# Altium PCB PCB1.PcbDoc (part 1 of 2)
Units mm, origin at the board's own origin, x right, y up, seen from the top; angles counter-clockwise.
Board outline 17.5 x 24.5 mm, 4 copper layers (Top Layer, Signal Layer 1, Signal Layer 2, Bottom Layer), stack 0.778 mm thick; 72 components, 48 nets, 266 pads, 79 vias.
Unrouted connection lines stored in the file: 1.
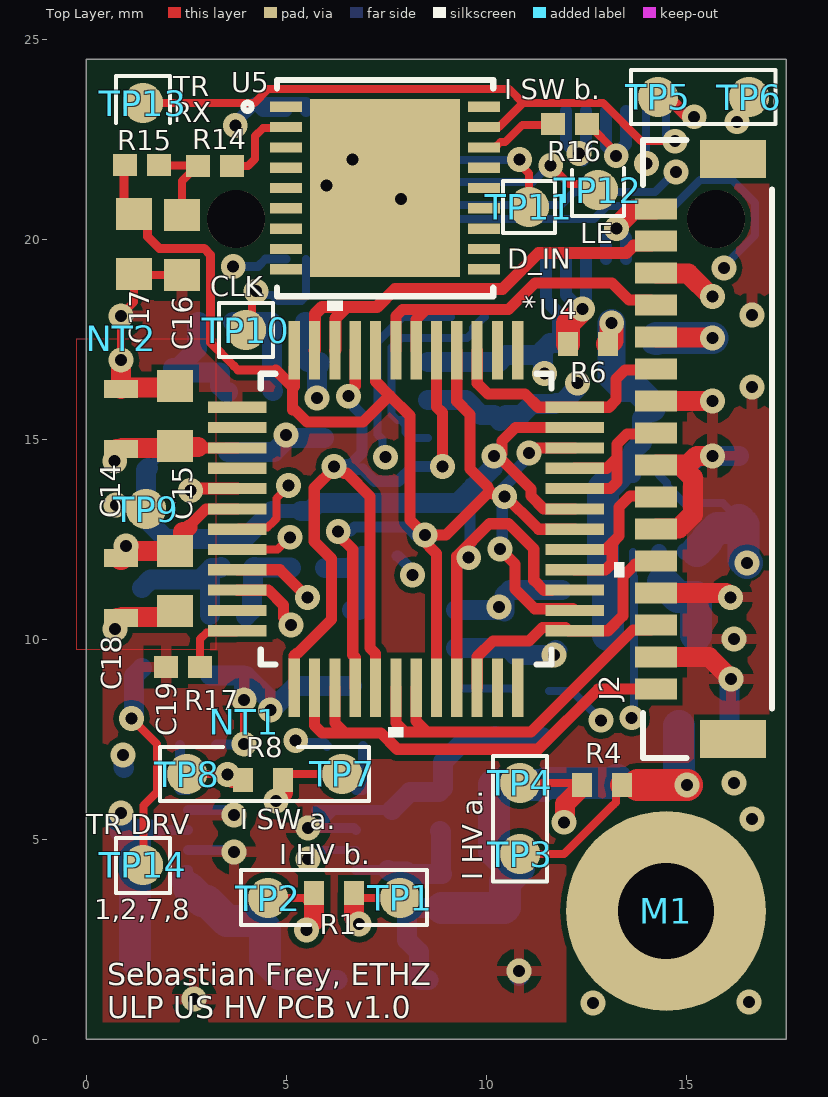
[diagram p0: Top Layer view]
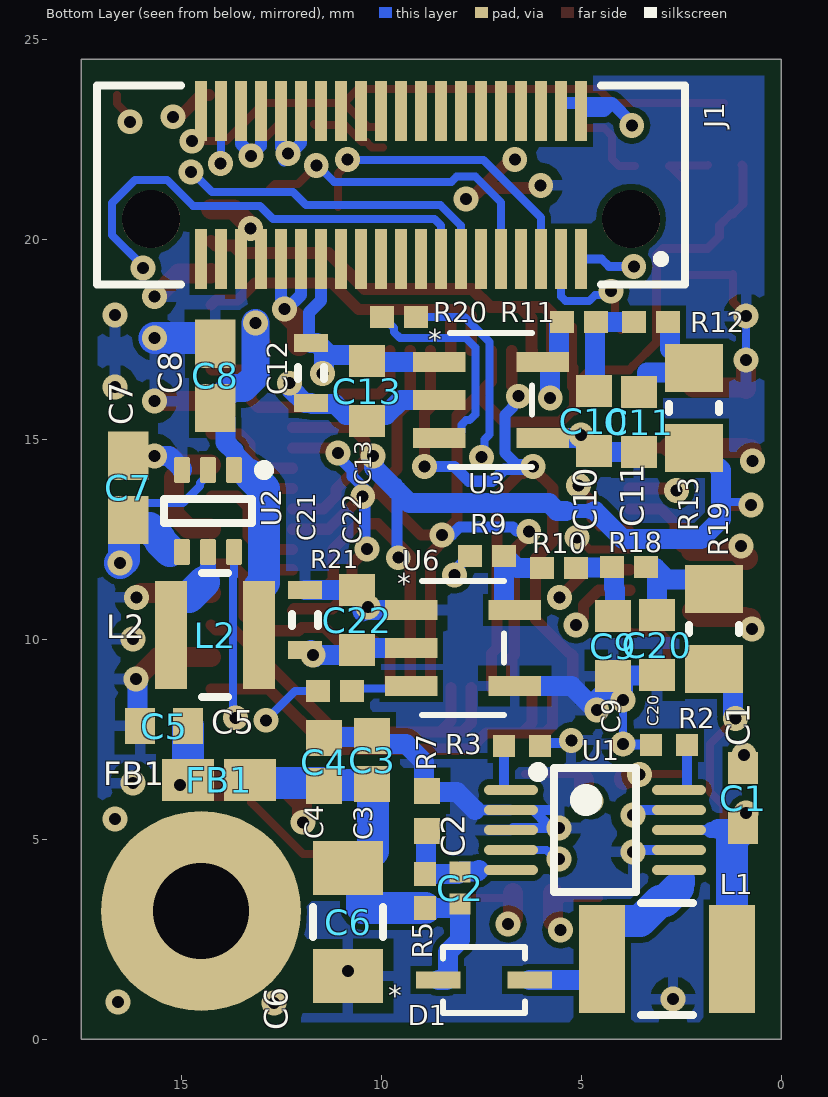
[diagram p1: Bottom Layer view, seen from below]
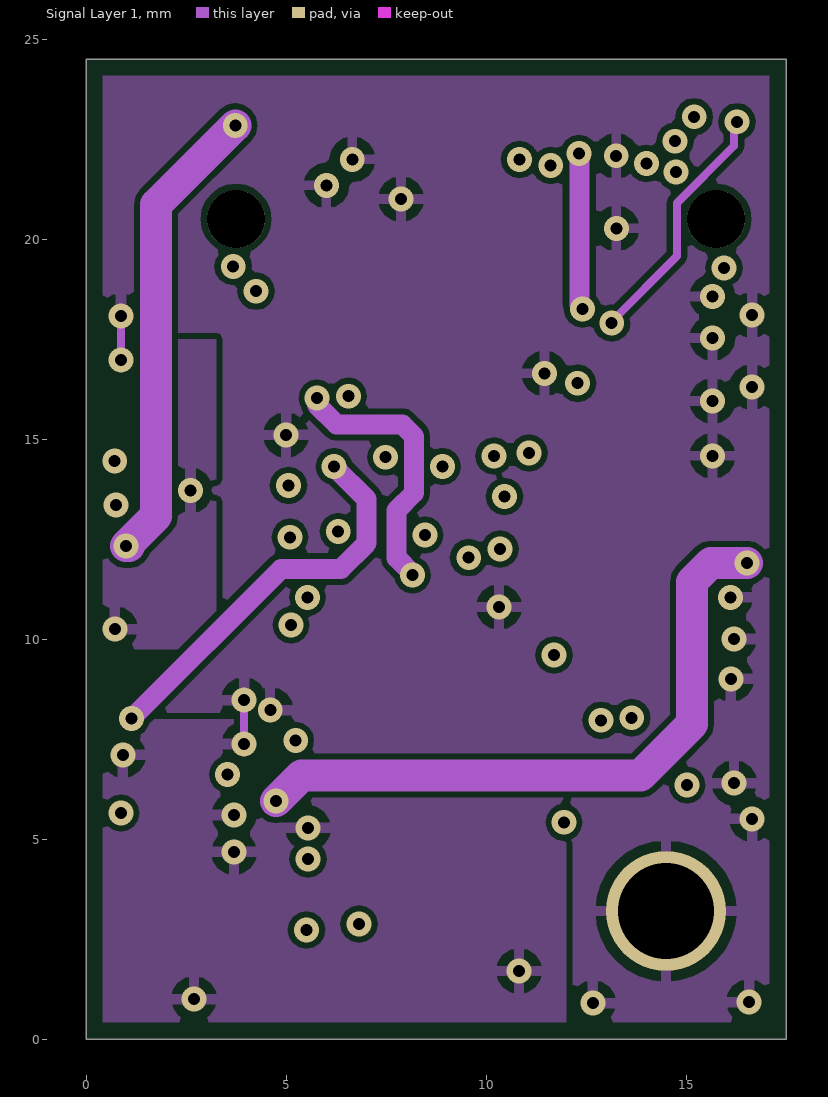
[diagram p2: Signal Layer 1]
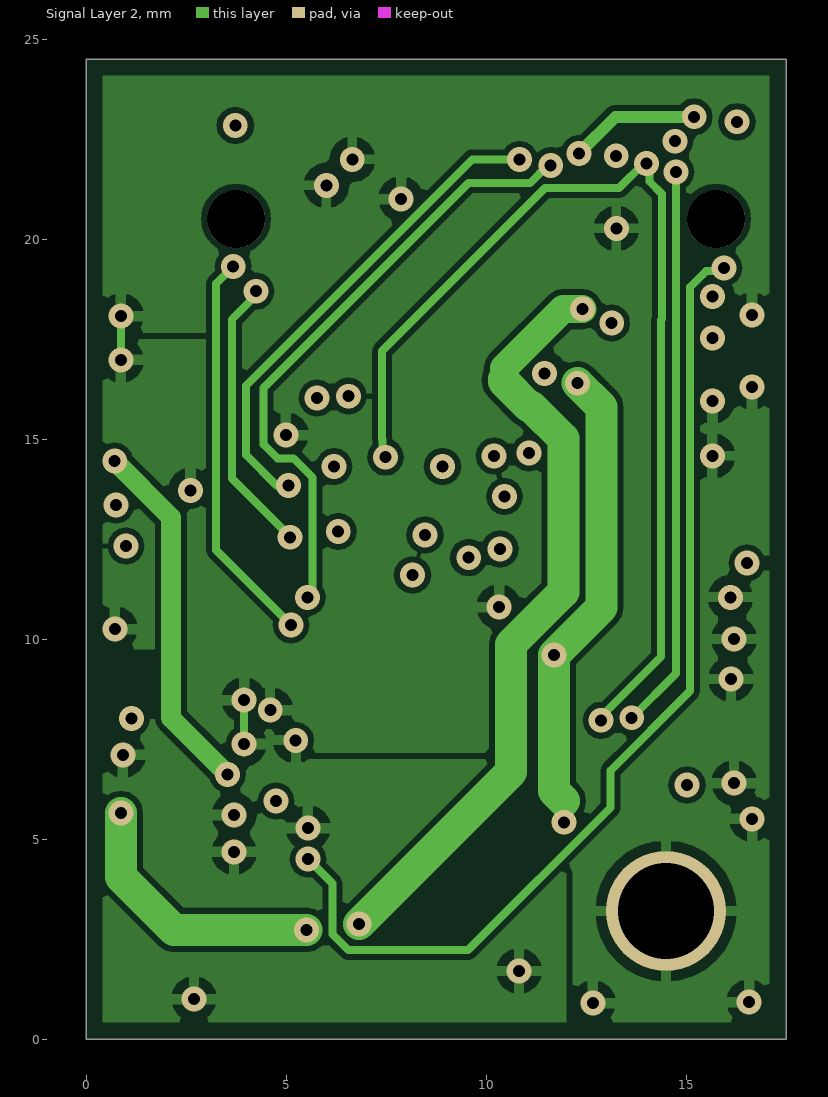
[diagram p3: Signal Layer 2]
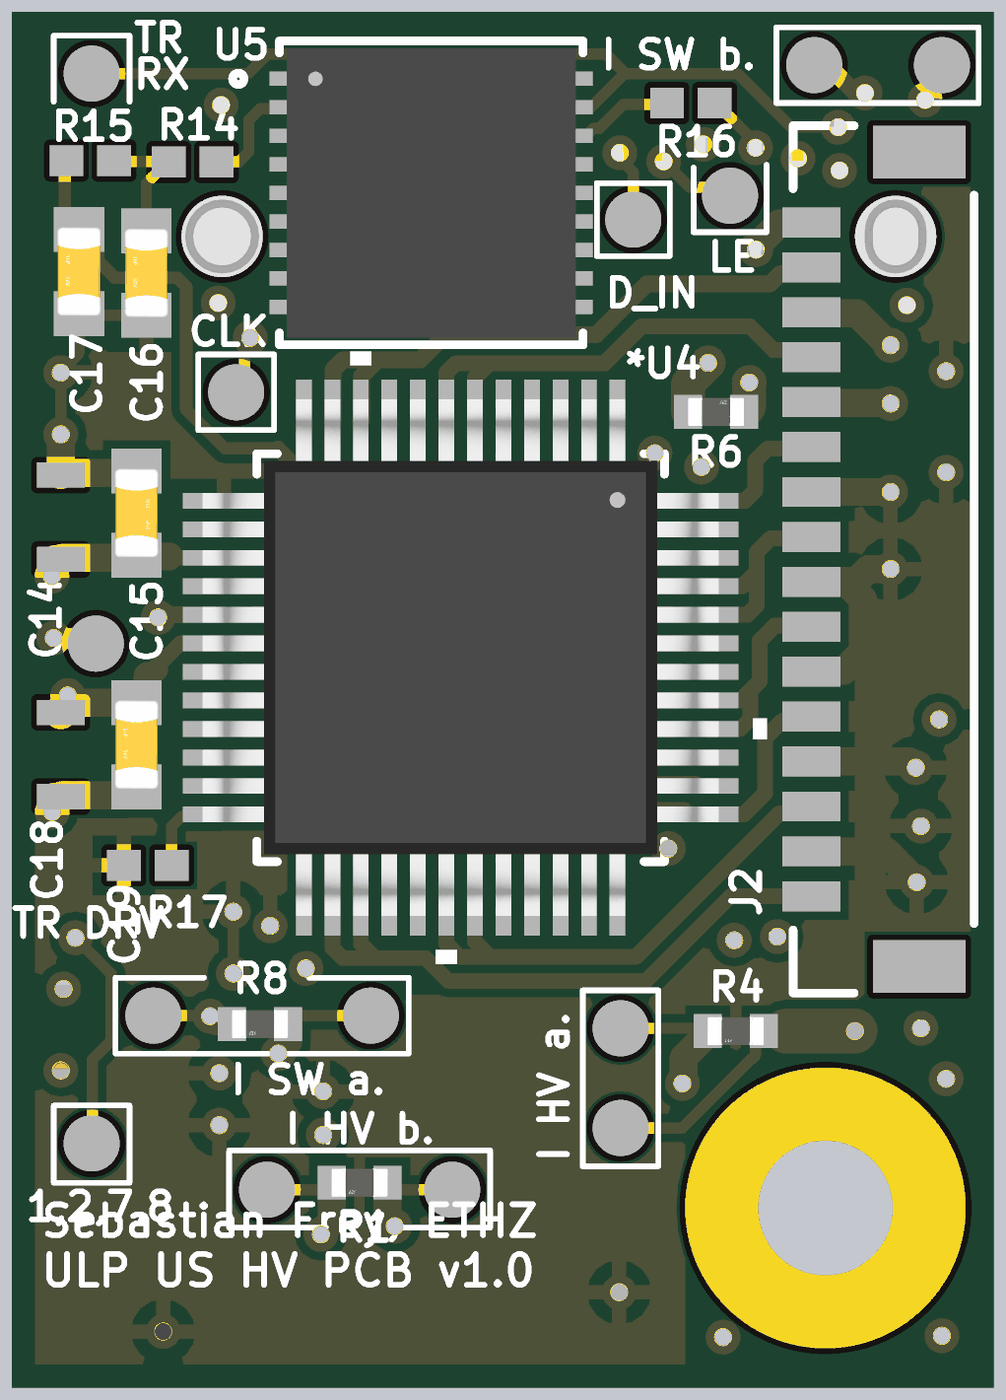
[diagram p4: 3D render of the assembled board from above, using the file's embedded part models]
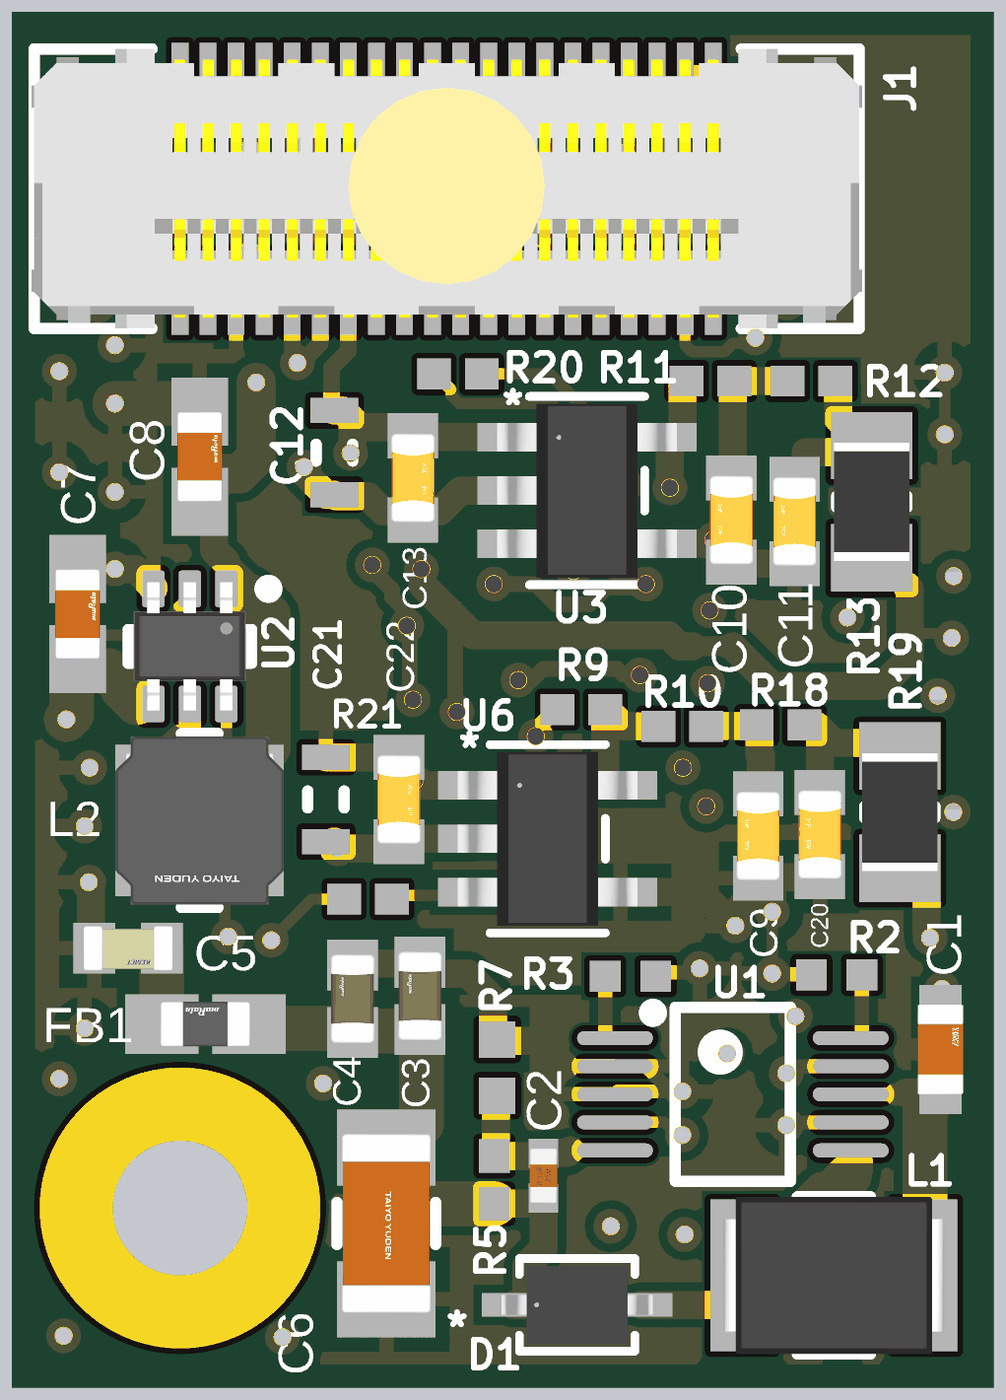
[diagram p5: 3D render of the assembled board from below, using the file's embedded part models]

## Layer stack, top to bottom
Top Solder: solder mask 0.0102, Solder Resist, Dk 3.5
Top Layer: signal copper 0.0356
Dielectric 1: core 0.254, FR-4, Dk 4.2
Signal Layer 1: signal copper 0.036
Dielectric 3: prepreg 0.127, Dk 4.2
Signal Layer 2: signal copper 0.036
Dielectric 2: core 0.254, Dk 4.2
Bottom Layer: signal copper 0.0356
Bottom Solder: solder mask 0.0102, Solder Resist, Dk 3.5

## Board outline
0,0 17.5,0 17.5,24.5 0,24.5

## Design rules (kind name [scope] priority, off if disabled: settings)
BoardOutlineClearance [Not OnSilkscreen] p1: gap=0.406 ignorepadtopadclearanceinfootprint=FALSE
Clearance [All] p1: gap=0.15 ignorepadtopadclearanceinfootprint=FALSE except(0: Arc-Hole Track-Hole SMDPad-Hole THPad-Hole Via-Hole Fill-Hole Poly-Hole Region-Hole Text-Hole)
HoleSize [All] p1: absolutevalues=TRUE maxlimit=2.54 minlimit=0.2 maxpercent=80.000 minpercent=20.000
PolygonConnect PolygonConnect_9 [All vs IsNamedPolygon('VSYS_3V3_IN_L01_P022')] p1: connectstyle=Direct reliefconductorwidth=0.254 reliefentries=4 polygonreliefangle="90 Angle" airgapwidth=0.254
PolygonConnect PolygonConnect_8 [All vs IsNamedPolygon('USS_GND_L01_P021')] p2: connectstyle=Direct reliefconductorwidth=0.254 reliefentries=4 polygonreliefangle="90 Angle" airgapwidth=0.254
PolygonConnect PolygonConnect_7 [All vs IsNamedPolygon('NETL1_1_L01_P020')] p3: connectstyle=Direct reliefconductorwidth=0.254 reliefentries=4 polygonreliefangle="90 Angle" airgapwidth=0.254
PolygonConnect PolygonConnect_6 [All vs IsNamedPolygon('NETC1_1_L01_P019')] p4: connectstyle=Direct reliefconductorwidth=0.254 reliefentries=4 polygonreliefangle="90 Angle" airgapwidth=0.254
PolygonConnect PolygonConnect_5 [All vs IsNamedPolygon('NETL2_1_L01_P016')] p5: connectstyle=Direct reliefconductorwidth=0.254 reliefentries=4 polygonreliefangle="90 Angle" airgapwidth=0.254
PolygonConnect PolygonConnect_4 [All vs IsNamedPolygon('VSYS_MCU_IN_L01_P018')] p6: connectstyle=Direct reliefconductorwidth=0.254 reliefentries=4 polygonreliefangle="90 Angle" airgapwidth=0.254
PolygonConnect PolygonConnect_3 [All vs IsNamedPolygon('NETL2_1_L01_P016')] p7: thpad.connectstyle=Direct thpad.reliefconductorwidth=0.254 thpad.reliefentries=4 thpad.polygonreliefangle="90 Angle" thpad.airgapwidth=0.254 smdpad.connectstyle=Relief smdpad.reliefconductorwidth=0.254 smdpad.reliefentries=4 smdpad.polygonreliefangle="90 Angle" smdpad.airgapwidth=0.254 via.connectstyle=Relief via.reliefconductorwidth=0.254 via.reliefentries=4 via.polygonreliefangle="90 Angle" via.airgapwidth=0.254
PolygonConnect PolygonConnect_2 [All vs IsNamedPolygon('NETC4_1_L01_P015')] p8: connectstyle=Direct reliefconductorwidth=0.254 reliefentries=4 polygonreliefangle="90 Angle" airgapwidth=0.254
PolygonConnect PolygonConnect_1 [All vs IsNamedPolygon('GND_L01_P001')] p9: connectstyle=Direct reliefconductorwidth=0.254 reliefentries=4 polygonreliefangle="90 Angle" airgapwidth=0.254
PolygonConnect [All] p10: connectstyle=Relief reliefconductorwidth=0.254 reliefentries=4 polygonreliefangle="90 Angle" airgapwidth=0.254
RoutingVias [All] p1: holewidth=0.3 width=0.62 viastyle="Through Hole" minholewidth=0.3 minwidth=0.62 maxholewidth=0.3 maxwidth=0.62
SilkToSilkClearance [All] p1: silktosilkclearance=0.01
SilkToSolderMaskClearance [IsPad] p1: minsilkscreentomaskgap=0.01 clearancetoexposedcopper=TRUE
SolderMaskExpansion [All] p1: expansion=0.102 istentingtop=FALSE
Width [All] p1: maxlimit=25 minlimit=0.2 preferedwidth=0.2 toplayer_maxwidth=2.5 midlayer1_maxwidth=2.5 midlayer2_maxwidth=2.5 minimp=50.000000 maximp=50.000000 favimp=50.000000
27 further rules are at their usual default settings.

## Classes and differential pairs
component class 01_TRANSDUCERS: C9 C10 C11 C12 C13 C14 C15 C16 C17 C18 C19 C20 C21 C22 J1 J2 R9 R10 R11 R12 R13 R14 R15 R16 R17 R18 R19 R20 R21 TP9 TP10 TP11 TP12 TP13 TP14 U3 U4 U5 U6
component class 00_POWER: C1 C2 C3 C4 C5 C6 C7 C8 D1 FB1 L1 L2 M1 NT1 NT2 R1 R2 R3 R4 R5 R6 R7 R8 TP1 TP2 TP3 TP4 TP5 TP6 TP7 TP8 U1 U2

## Components (designator, comment, footprint, x,y, rotation, side; value= is the part's Value field where it differs from the comment)
C1 "06036D475KAT2A" FP-0603-L_1_6_0_15-W_0_81-MFG 0.95,6.025 r90 bottom
C2 "C0402C479C5GACTU" FP-C0402-BB-MFG 8.025,3.775 r90 bottom value="4.7 pF"
C3 "GRM188R61H225KE11D" FP-GRM188-0_2-IPC_C 10.225,6.975 r90 bottom
C4 "GRM188R61H225KE11D" FP-GRM188-0_2-IPC_C 11.425,6.925 r90 bottom
C5 "C0603C104M5RACTU" FP-C0603C-CF-MFG 15.425,7.825 r0 bottom value="0.10 μF"
C6 "GMK316BJ105KLHT" FP-1206-L_3_2_0_15-W_1_6-IPC_B 10.825,2.925 r270 bottom
C7 "GRM188R60J106ME47D" FP-GRM188-0_1-e0_2_0_55-IPC_A 16.325,13.777 r90 bottom
C8 "GRM188R60J106ME47D" FP-GRM188-0_1-e0_2_0_55-IPC_A 14.15,16.577 r90 bottom
C9 "CC0603KRX7R9BB104" FP-CC0603-DA-MFG 4.2,9.825 r270 bottom value="100 nF"
C10 "CC0603KRX7R9BB104" FP-CC0603-DA-MFG 4.675,15.45 r270 bottom value="100 nF"
C11 "CC0603KRX7R9BB104" FP-CC0603-DA-MFG 3.55,15.425 r270 bottom value="100 nF"
C12 "C1608X5R1H105K080AB" CAPC1608X90X20LL10 11.75,16.65 r270 bottom
C13 "CC0603KRX7R9BB104" FP-CC0603-DA-MFG 10.35,16.2 r90 bottom value="100 nF"
C14 "C1608X5R1H105K080AB" CAPC1608X90X20LL10 0.875,15.5 r270 top
C15 "CC0603KRX7R9BB104" FP-CC0603-DA-MFG 2.225,15.575 r90 top value="100 nF"
C16 "CC0603KRX7R9BB104" FP-CC0603-DA-MFG 2.4,19.85 r270 top value="100 nF"
C17 "CC0603KRX7R9BB104" FP-CC0603-DA-MFG 1.2,19.875 r270 top value="100 nF"
C18 "C1608X5R1H105K080AB" CAPC1608X90X20LL10 0.875,11.275 r90 top
C19 "CC0603KRX7R9BB104" FP-CC0603-DA-MFG 2.225,11.45 r270 top value="100 nF"
C20 "CC0603KRX7R9BB104" FP-CC0603-DA-MFG 3.1,9.85 r270 bottom value="100 nF"
C21 "C1608X5R1H105K080AB" CAPC1608X90X20LL10 11.9,10.475 r270 bottom
C22 "CC0603KRX7R9BB104" FP-CC0603-DA-MFG 10.6,10.475 r90 bottom value="100 nF"
D1 "ZHCS400QTA" DIODE_SOD323_DIO 7.425,1.475 r180 bottom
FB1 "BLM18PG300SH1D" FP-BLM18-0_15-t0_8-IPC_A 14.05,6.475 r0 bottom
J1 "LSHM-120-02.5-L-DV-A-N-K-TR" SAMTEC_LSHM-120-XX.X-X-DV-A-N-XX 9.75,21.35 r180 bottom locked
J2 "DF52-16S-0.8H(21)" CONN_DF52-16S-0.8H(21)_HIR 15.536,14.75 r90 top locked
L1 "B82422A1103K100" TDK-B82422A1103K100_V 2.85,2 r0 bottom
L2 "NR3012T4R7M" FP-NR3012-MFG 14.15,10.1 r0 bottom
M1 "Mounting Hole for AFE PCB" "Hole M2" 14.5,3.2 r0 top locked
NT1 "Net Tie" Net_Tie_Top_Bottom 3.95,7.975 r270 top net-tie
NT2 "Net Tie" Net_Tie_Top_Bottom 0.875,17.575 r270 top net-tie
R1 "CSR0402FK1R00" FP-CSR0402-MFG 6.2,3.65 r180 top
R2 "ERJ-2GEJ101X" RESC1005X40X25NL05T05 2.8,7.35 r0 bottom
R3 "ERJ-2GEJ101X" RESC1005X40X25NL05T05 6.475,7.325 r180 bottom
R4 "CSR0402FK1R00" FP-CSR0402-MFG 12.9,6.35 r180 top
R5 "RC0402FR-072ML" RESC1005X40X25NL05T10 8.9,3.7 r270 bottom
R6 "CSR0402FK1R00" FP-CSR0402-MFG 12.55,17.375 r0 top
R7 "ERJ-2RKF1783X" RESC1005X40X25ML05T05 8.85,5.7 r270 bottom
R8 "CSR0402FK1R00" FP-CSR0402-MFG 4.425,6.475 r180 top
R9 "RC0402JR-070RL" RESC1005X40X25NL05T10 7.35,12.075 r180 bottom
R10 "RC0402JR-070RL" RESC1005X40X25NL05T10 5.55,11.775 r0 bottom
R11 "RC0402JR-070RL" RESC1005X40X25NL05T10 5.05,17.925 r0 bottom
R12 "RC0402JR-070RL" RESC1005X40X25NL05T10 3.25,17.925 r0 bottom
R13 "RC0805FR-07100RL" RESC2013X60X35ML10T20 2.175,15.775 r270 bottom
R14 "RC0402JR-070RL" RESC1005X40X25NL05T10 3.225,21.825 r0 top
R15 "RC0402JR-070RL" RESC1005X40X25NL05T10 1.4,21.85 r0 top
R16 "RC0402JR-070RL" RESC1005X40X25NL05T10 12.1,22.875 r0 top
R17 "RC0402JR-070RL" RESC1005X40X25NL05T10 2.425,9.3 r180 top
R18 "RC0402JR-070RL" RESC1005X40X25NL05T10 3.8,11.8 r0 bottom
R19 "RC0805FR-07100RL" RESC2013X60X35ML10T20 1.675,10.25 r270 bottom
R20 "RC0402JR-070RL" RESC1005X40X25NL05T10 9.55,18.05 r0 bottom
R21 "RC0402JR-070RL" RESC1005X40X25NL05T10 11.15,8.7 r180 bottom
TP1 "TP-SM-C-100" TP-SM-C-100 7.85,3.525 r0 top
TP2 "TP-SM-C-100" TP-SM-C-100 4.55,3.525 r90 top
TP3 "TP-SM-C-100" TP-SM-C-100 10.85,4.625 r90 top
TP4 "TP-SM-C-100" TP-SM-C-100 10.85,6.4 r90 top
TP5 "TP-SM-C-100" TP-SM-C-100 14.3,23.55 r90 top
TP6 "TP-SM-C-100" TP-SM-C-100 16.575,23.55 r90 top
TP7 "TP-SM-C-100" TP-SM-C-100 6.4,6.625 r90 top
TP8 "TP-SM-C-100" TP-SM-C-100 2.525,6.625 r90 top
TP9 "TP-SM-C-100" TP-SM-C-100 1.5,13.25 r90 top
TP10 "TP-SM-C-100" TP-SM-C-100 4,17.725 r90 top
TP11 "TP-SM-C-100" TP-SM-C-100 11.075,20.8 r90 top
TP12 "TP-SM-C-100" TP-SM-C-100 12.8,21.225 r90 top
TP13 "TP-SM-C-100" TP-SM-C-100 1.425,23.4 r90 top
TP14 "TP-SM-C-100" TP-SM-C-100 1.425,4.35 r90 top
U1 "LT1945IMS#PBF" LT-MS-10_L 4.65,5.225 r180 bottom
U2 "TPS61222DCKR" DCK0006A_L 14.325,13.2 r270 bottom
U3 "MCP1402T-E/OT" SOT-23-5_MC_MCH 7.25,15.975 r180 bottom
U4 "HV2708T-C/R8X" LQFP48_7X7MC_MCH 8,13 r270 top locked
U5 "MD0101K6-G" DFN18_5X5_MCH 7.475,21.275 r0 top
U6 "MCP1402T-E/OT" SOT-23-5_MC_MCH 7.95,9.775 r180 bottom

## Footprints (in the part's own frame and the unit in brackets; to place one, negate y for a bottom-side part, rotate by r counter-clockwise, add the part's x,y. Pads: shape width x height; smd on the part's side, far side on the other; paste and mask are expansions set on the pad)
CAPC1608X90X20LL10 [mm] "Chip Capacitor, 2-Leads, Body 1.70x0.90mm, IPC High Density"
  rect 0.45x0.85 smd: 1(-0.75,0) 2(0.75,0)
  silkscreen extent -0.15,-0.33 0.15,0.33, body extent -0.85,-0.45 0.85,0.45, height 0.9
CONN_DF52-16S-0.8H(21)_HIR [mil]
  rect 21x41 smd paste+0 mask+0: 1(-236.22,50.63) 2(-204.72,50.63) 3(-173.23,50.63) 4(-141.73,50.63) 5(-110.24,50.63) 6(-78.74,50.63) 7(-47.24,50.63) 8(-15.75,50.63) 9(15.75,50.63) 10(47.24,50.63) 11(78.74,50.63) 12(110.24,50.63) 13(141.73,50.63) 14(173.23,50.63) 15(204.72,50.63) 16(236.22,50.63)
  rect 37x65 smd: 17(-285.43,-24.96) 18(285.43,-24.96)
  silkscreen extent -304,-64 304,64, body extent 0,0 10,10, height 10
DCK0006A_L [mm] "SOT23, 6-Leads, Body 2.15x1.4mm, Pitch 0.65mm, IPC High Density"
  rrect25% 0.65x0.4 smd: 1(-1.025,0.65) 2(-1.025,0) 3(-1.025,-0.65) 4(1.025,-0.65) 5(1.025,0) 6(1.025,0.65)
  silkscreen extent -1.15,-1.1 0.3,1.52, body extent -1.14,-1 1.14,1, height 0.94
DFN18_5X5_MCH [mil]
  rect 31.81x10.03 smd paste+0 mask+0: 1(-97.41,80) 2(-97.41,60) 3(-97.41,40) 4(-97.41,20) 5(-97.41,0) 6(-97.41,-20) 7(-97.41,-40) 8(-97.41,-60) 9(-97.41,-80) 10(97.41,-80) 11(97.41,-60) 12(97.41,-40) 13(97.41,-20) 14(97.41,0) 15(97.41,20) 16(97.41,40) 17(97.41,60) 18(97.41,80)
  rect 148x175 smd paste+0 mask+0: 19(0,0)
  silkscreen extent -139,-106 106,106, body extent -101,-101 101,101, height 39
DIODE_SOD323_DIO [mil]
  rect 43.56x16.36 smd paste+0 mask+0: 1(-45,0) 2(45,0)
  silkscreen extent -41,-33 41,33, body extent -53,-27 53,27, height 47
FP-0603-L_1_6_0_15-W_0_81-MFG [mm]
  rect 0.8x0.75 smd paste+0 mask+0: 1(-0.75,0) 2(0.75,0)
  body extent -0.8,-0.4 0.8,0.4, height 0.94
FP-1206-L_3_2_0_15-W_1_6-IPC_B [mm]
  rect 1.355x1.758 smd paste+0 mask+0: 1(-1.351,0) 2(1.351,0)
  silkscreen extent -0.37,-0.88 0.37,0.88, body extent -1.6,-0.8 1.6,0.8, height 1.8
FP-BLM18-0_15-t0_8-IPC_A [mm]
  rect 1.306x1.058 smd paste+0 mask+0: 1(-0.776,0) 2(0.776,0)
  body extent -0.8,-0.4 0.8,0.4, height 0.95
FP-C0402-BB-MFG [mm]
  rect 0.52x0.52 smd paste+0 mask+0: 1(-0.4,0) 2(0.4,0)
  body extent -0.5,-0.25 0.5,0.25, height 0.55
FP-C0603C-CF-MFG [mm]
  rect 0.75x0.9 smd paste+0 mask+0: 1(-0.6,0) 2(0.6,0)
  body extent -0.8,-0.4 0.8,0.4, height 0.87
FP-CC0603-DA-MFG [mm]
  rect 0.8x0.9 smd paste+0 mask+0: 1(-0.75,0) 2(0.75,0)
  body extent -0.8,-0.4 0.8,0.4, height 0.9
FP-CSR0402-MFG [mm]
  rect 0.5x0.6 smd paste+0 mask+0: 1(-0.5,0) 2(0.5,0)
  body extent -0.85,-0.4 0.85,0.4, height 0.25
FP-GRM188-0_1-e0_2_0_55-IPC_A [mm]
  rect 1.208x1.012 smd paste+0 mask+0: 1(-0.802,0) 2(0.802,0)
  body extent -0.8,-0.4 0.8,0.4, height 0.9
FP-GRM188-0_2-IPC_C [mm]
  rect 0.905x0.906 smd paste+0 mask+0: 1(-0.601,0) 2(0.601,0)
  body extent -0.8,-0.4 0.8,0.4, height 1
FP-NR3012-MFG [mm]
  rect 0.8x2.7 smd paste+0 mask+0: 1(-1.1,0) 2(1.1,0)
  silkscreen extent -0.33,-1.55 0.33,1.55, body extent -1.5,-1.5 1.5,1.5, height 1.2
"Hole M2" [mm] "Plated Thru-Hole, M2 (2.4mm hole, 5mm pad)"
  round 5 / inner round 3 / far side round 5 hole 2.4: 1(0,0)
LQFP48_7X7MC_MCH [mil]
  rect 57.56x11 smd paste+0 mask+0: 1(-166,110) 2(-166,90) 3(-166,70) 4(-166,50) 5(-166,30) 6(-166,10) 7(-166,-10) 8(-166,-30) 9(-166,-50) 10(-166,-70) 11(-166,-90) 12(-166,-110) 25(166,-110) 26(166,-90) 27(166,-70) 28(166,-50) 29(166,-30) 30(166,-10) 31(166,10) 32(166,30) 33(166,50) 34(166,70) 35(166,90) 36(166,110)
  rect 11x57.56 smd paste+0 mask+0: 13(-110,-166) 14(-90,-166) 15(-70,-166) 16(-50,-166) 17(-30,-166) 18(-10,-166) 19(10,-166) 20(30,-166) 21(50,-166) 22(70,-166) 23(90,-166) 24(110,-166) 37(110,166) 38(90,166) 39(70,166) 40(50,166) 41(30,166) 42(10,166) 43(-10,166) 44(-30,166) 45(-50,166) 46(-70,166) 47(-90,166) 48(-110,166)
  silkscreen extent -215,-143 215,215, body extent -181,-181 181,181, height 63
LT-MS-10_L [mm] "SOP, 10-Leads, Body 3.1x3.1mm, Pitch 0.5mm, IPC High Density"
  oval 1.35x0.25 smd: 1(-2.1,1) 2(-2.1,0.5) 3(-2.1,0) 4(-2.1,-0.5) 5(-2.1,-1) 6(2.1,-1) 7(2.1,-0.5) 8(2.1,0) 9(2.1,0.5) 10(2.1,1)
  silkscreen extent -1.55,-1.55 1.02,1.57, body extent -1.55,-1.55 1.55,1.55, height 1.1
Net_Tie_Top_Bottom [mm]
  round 0.62 hole 0.3 mask+0.102: 1(-0.5,0) 2(0.6,0)
  Multi-Layer region: -0.225,-0.1 0.325,-0.1 0.325,0.1 -0.225,0.1
RESC1005X40X25ML05T05 [mm] "Chip Resistor, 2-Leads, Body 1.00x0.50mm, IPC Low Density"
  rect 0.65x0.65 smd: 1(-0.5,0) 2(0.5,0)
  body extent -0.53,-0.27 0.53,0.28, height 0.4
RESC1005X40X25NL05T05 [mm] "Chip Resistor, 2-Leads, Body 1.00x0.50mm, IPC Medium Density"
  rect 0.55x0.55 smd: 1(-0.45,0) 2(0.45,0)
  body extent -0.53,-0.27 0.53,0.28, height 0.4
RESC1005X40X25NL05T10 [mm] "Chip Resistor, 2-Leads, Body 1.00x0.50mm, IPC Medium Density"
  rect 0.6x0.55 smd: 1(-0.425,0) 2(0.425,0)
  body extent -0.53,-0.27 0.53,0.28, height 0.4
RESC2013X60X35ML10T20 [mm] "Chip Resistor, 2-Leads, Body 2.1x1.35mm, IPC Low Density"
  rect 1.2x1.45 smd: 1(-1,0) 2(1,0)
  silkscreen extent -0.1,-0.63 0.1,0.63, body extent -1.05,-0.68 1.05,0.67, height 0.6
SAMTEC_LSHM-120-XX.X-X-DV-A-N-XX [mm]
  rect 0.3x1.5 smd: 01(4.75,-1.85) 02(4.75,1.85) 03(4.25,-1.85) 04(4.25,1.85) 05(3.75,-1.85) 06(3.75,1.85) 07(3.25,-1.85) 08(3.25,1.85) 09(2.75,-1.85) 10(2.75,1.85) 11(2.25,-1.85) 12(2.25,1.85) 13(1.75,-1.85) 14(1.75,1.85) 15(1.25,-1.85) 16(1.25,1.85) 17(0.75,-1.85) 18(0.75,1.85) 19(0.25,-1.85) 20(0.25,1.85) 21(-0.25,-1.85) 22(-0.25,1.85) 23(-0.75,-1.85) 24(-0.75,1.85) 25(-1.25,-1.85) 26(-1.25,1.85) 27(-1.75,-1.85) 28(-1.75,1.85) 29(-2.25,-1.85) 30(-2.25,1.85) 31(-2.75,-1.85) 32(-2.75,1.85) 33(-3.25,-1.85) 34(-3.25,1.85) 35(-3.75,-1.85) 36(-3.75,1.85) 37(-4.25,-1.85) 38(-4.25,1.85) 39(-4.75,-1.85) 40(-4.75,1.85)
  round 1.45 hole 1.45 unplated: ""(-6,-0.85) ""(6,-0.85)
  silkscreen extent -7.35,-2.49 7.35,2.49, body extent -7.4,-2.49 7.4,2.49, height 4.11
SOT-23-5_MC_MCH [mil]
  rect 51.56x20 smd paste+0 mask+0: 1(-51,37.4) 2(-51,0) 3(-51,-37.4) 4(51,-37.4) 5(51,37.4)
  silkscreen extent -41,-66 41,66, body extent -63,-61 63,61, height 57
TDK-B82422A1103K100_V [mm] "Molded Inductor, 2-Leads, Body 3.5x2.8mm"
  rect 1.15x2.7 smd: 1(-1.625,0) 2(1.625,0)
  silkscreen extent -0.65,-1.4 0.65,1.4, body extent -1.97,-1.4 1.97,1.4, height 2.1
TP-SM-C-100 [mm] "Test Point, Surface Mounting, Circular, Pad Diameter 1mm"
  round 1 smd: 1(0,0)

## Part data
C1: library part CMP-2006-04481-2, "General Purpose Ceramic Capacitor, 0603, 4.7uF, 10%, X5R, 15%, 6.3V", Capacitance=4.7uF, Case Code (Imperial)=0603, Case Code (Metric)=1608, Dielectric=X5R, Dielectric Material=Ceramic, Max Operating Temperature=85°C, Min Operating Temperature=-55°C, Package Quantity=1, Tolerance=20%, Voltage=6.3V, Case/Package=0603, Construction=Flat, Contact Plating=Tin, Depth=0.81mm, Height=0.9mm, Lead Free="Lead Free", Length=1.6mm, Mount="Surface Mount", Number of Pins=2, Packaging="Tape and Reel", Radiation Hardening=No, REACH SVHC="No SVHC", RoHS Compliant=Yes, Series=-, Termination=SMD/SMT, Thickness=0.035inch, Voltage Rating=6.3V, Voltage Rating (DC)=6.3V, Width=0.032inch
C2: library part CMP-2008-03310-2, "CAP CER 4.7PF 50V NP0 0402", Capacitance="4.7 pF", Manufacturer=Kemet, Package=C0402-BB, Temperature="-55°C to +125°C", Temperature Characteristic=C0G, Temperature Coefficient=15%, Temperature Range High=+125°C, Temperature Range Low=-55°C, Tolerance="0.25 pF", Voltage Rating="50 V", Automotive=No, Category=Cap, ComponentLink2Description=Datasheet, ComponentLink2URL=https://content.kemet.com/datasheets/KEM_C1002_X7R_SMD.pdf, Device Class L1="Passive Components", Device Class L2=Capacitors, Device Class L3="Ceramic Capacitors", Digikey Description="CAP CER 4.7PF 50V NP0 0402", Height=0.55mm, Ipc Land Pattern Name=CAPC10050X50, Lead Free=Yes, Manufacturer Part Number=C0402C479C5GACTU, Material=Ceramic, Mouser Description="Multilayer Ceramic Capacitors MLCC - SMD/SMT 50volts 4.7pF C0G .25pF", Octopart=https://octopart.com/c0402c479c5gactu-kemet-9144199, RoHS=TRUE
C3 C4: library part CMP-06035-042125-1, "Chip Multilayer Ceramic Capacitors for General Purpose, 0603, 2.2uF, X5R, 15%, 10%, 50V", Capacitance=2.2uF, Case Code (Imperial)=0603, Case Code (Metric)=1608, Dielectric=X5R, Max Operating Temperature=85°C, Min Operating Temperature=-55°C, Tolerance=10%, Voltage Rating=50V, Case/Package=0603, Height=0.8mm, Length=0.063inch, Material=Ceramic, Mount="Surface Mount", Packaging="Cut Tape", REACH SVHC="No SVHC", Thickness=0.039inch, Voltage Rating (DC)=50V, Width=0.031inch
C5: library part CMP-2006-03068-2, "CAP CER 0.1UF 50V 20% X7R 0603", Capacitance="0.10 μF", Manufacturer=KEMET, Package=C0603C-CF, Temperature="-55°C to +125°C", Temperature Characteristic=X7R, Temperature Coefficient=30ppm/°C, Temperature Range High=+125°C, Temperature Range Low=-55°C, Tolerance=0.2, Voltage Rating="50 V", Automotive=Yes, Automotive Grade="Grade 1", Category=Cap, ComponentLink2Description=Datasheet, ComponentLink2URL=https://api.kemet.com/component-edge/download/datasheet/C0603C100J5GACAUTO.pdf, Device Class L1="Passive Components", Device Class L2=Capacitors, Device Class L3="Ceramic Capacitors", Digikey Description="CAP CER 0.1UF 50V 20% X7R 0603", Height=0.87mm, Lead Free=Yes, Manufacturer Part Number=C0603C104M5RACTU, Material=Ceramic, Mouser Description="Multilayer Ceramic Capacitors MLCC - SMD/SMT 50volts 0.1uF X7R 20%", Octopart=https://octopart.com/c0603c104m5ractu-kemet-11855687, RoHS=TRUE
C6: library part CMP-14477-003256-2, "None", Capacitance=1uF, Case Code (Imperial)=1206, Case Code (Metric)=3216, Dielectric=X5R, Max Operating Temperature=85°C, Min Operating Temperature=-55°C, Package Quantity=2000, Ratings=AEC-Q200, Tolerance=10%, Voltage Rating=35V, Case/Package=1206, Halogen Free="Halogen Free", Height=1.6mm, Lead Free="Lead Free", Length=0.126inch, Mount="Surface Mount", Packaging="Tape and Reel", RoHS Compliant=Yes, Termination=SMD/SMT, Thickness=0.071inch, Voltage Rating (DC)=35V, Width=0.063inch
C7 C8: library part CMP-2006-02792-2, "Chip Multilayer Ceramic Capacitors for General Purpose, 0603, 10uF, X5R, 15%, 20%, 6.3V", Capacitance=10uF, Case Code (Imperial)=0603, Case Code (Metric)=1608, Dielectric=X5R, Max Operating Temperature=85°C, Min Operating Temperature=-55°C, Package Quantity=4000, Tolerance=20%, Voltage=6.3V, Case/Package=0603, Depth=0.8mm, Height=0.8mm, Lead Free="Lead Free", Length=1.6mm, Material=Ceramic, Mount="Surface Mount", Packaging="Tape and Reel", Radiation Hardening=No, REACH SVHC="No SVHC", Termination=SMD/SMT, Thickness=0.035inch, Voltage Rating=6.3V, Voltage Rating (DC)=6.3V, Width=0.031inch
C9 C10 C11 C13 C15 C16 C17 C19 C20 C22: library part CMP-2100-03601-2, "CAP CER 0.1UF 50V X7R 0603", Capacitance="100 nF", Manufacturer=YAGEO, Package=CC0603-DA, Temperature="-55°C to +125°C", Temperature Characteristic=X7R, Temperature Coefficient=15%, Temperature Range High=+125°C, Temperature Range Low=-55°C, Tolerance=0.1, Voltage="50 V", Automotive=No, Category=Cap, ComponentLink2Description=Datasheet, ComponentLink2URL=http://www.yageo.com/documents/recent/UPY-GPHC_X7R_6.3V-to-50V_18.pdf, Device Class L1="Passive Components", Device Class L2=Capacitors, Device Class L3="Ceramic Capacitors", Digikey Description="CAP CER 0.1UF 50V X7R 0603", Footprint Url=http://www.yageo.com/exep/pages/download/literatures/UPY-C_GEN_24.pdf, Height=0.9mm, Lead Free=Yes, Manufacturer Part Number=CC0603KRX7R9BB104, Material=Ceramic, Mouser Description="Multilayer Ceramic Capacitor, CC Series, 0.1 - F, - 10%, X7R, 50 V, 0603 [1608 Metric]", Octopart=https://octopart.com/cc0603krx7r9bb104-yageo-42244635, RoHS=TRUE, Voltage Rating="50 V"
C12 C14 C18 C21: library part CMP-2000-06025-1, "Chip Capacitor, 1 uF, +/- 10%, 50 V, -55 to 85 degC, 0603 (1608 Metric), RoHS, Tape and Reel", Capacitance=1µF, Manufacturer=TDK, Operating Temperature=-55°C~85°C, Package / Case=0603(1608Metric), Package Description="2-Pin Surface Mount Device, Body 1.6 x 0.8 mm", Package Reference=0603, PCN Part Number=MLCCPartNumberChange30/Nov/2012, Ratings=-, Standard Package=1, Temperature Coefficient=X5R, Tolerance=±10%, Voltage - Rated=50V, Applications=GeneralPurpose, Category=Capacitors, Datasheet URL=https://product.tdk.com/info/en/catalog/datasheets/mlcc_commercial_general_en.pdf, Datasheet Version=08/2016, Design Resources=20WNon-IsolatedBuckLEDDriverUsingPLLNK460KG, Family=CeramicCapacitors, Features=-, Height - Seated (Max)=-, Lead Spacing=-, Lead Style=-, Manufacturer URL=http://www.tdk.com/, Mounting Technology=SurfaceMount, Mounting Type=SurfaceMount,MLCC, Online Catalog=CSeries,GeneralPurpose, Other Names=445-7468-6, Packaging=Digi-Reel®, Product Training Modules=CSeriesGeneralApplicationsSEAT,CCV,andTVCLDesignToolsGuidetoReplacinganElectrolyticCapacitorwithanMLCC, RoHS Information=RoHSCertificate-MLCC, Series=C, Size / Dimension="0.063\"Lx0.031\"W(1.60mmx0.80mm)", Thickness (Max)="0.035\"(0.90mm)"
D1: "Diode Schottky 40V 1A Automotive 2-Pin SOD-323 T/R", Average Rectified Current=1A, Manufacturer=Diodes, Max Reverse Voltage (DC)=40V, Supplier Part Number 1=3127490, Category="Rectifier Diodes", ComponentLink1Description=http://www.mouser.com/ds/2/115/ZHCS400Q-959646.pdf?src-supplier=Mouser, ComponentLink1URL=http://www.mouser.com/ds/2/115/ZHCS400Q-959646.pdf?src-supplier=Mouser, Manufacturer Part Number=ZHCS400QTA, Mount="Surface Mount", Packaging="Tape and Reel", Pricing 1="5=0.87300, 10=0.73400, 100=0.49400, 500=0.38800 (CHF)", RoHS=Yes, RoHS Compliant=Yes, Stock 1=385, Supplier 1=Farnell
FB1: library part CMP-06046-000808-1, "Chip Ferrite Bead, 0603, 30Ω @ 100MHz, 0.05Ω, , 1A", Case Code (Imperial)=0603, Case Code (Metric)=1608, DC Resistance (DCR)=50mR, Max Current Rating=1A, Max Operating Temperature=125°C, Min Operating Temperature=-55°C, Package Quantity=1, Ratings=AEC-Q200, Test Frequency=100MHz, Tolerance=25%, Case/Package=0603, Contact Plating=Tin, Height=0.037inch, Impedance="30 ohm", Length=1.6mm, Max DC Current=1A, Mount="Surface Mount", Number of Circuits=1, Number of Lines=1, Packaging="Tape and Reel", Shielding=Unshielded, Termination=SMD/SMT, Width=0.031inch
J1: "Conn Socket and Terminal Strip HDR/SKT 40 POS 0.5mm Solder ST SMD T/R", Housing Color=Black, Manufacturer=Samtec, Max Operating Temperature=125°C, Min Operating Temperature=-55°C, Supplier Part Number 1=SAM13196CT-ND, Category=Connectors, ComponentLink1Description=http://www.farnell.com/datasheets/2372721.pdf?src-supplier=Farnell, ComponentLink1URL=http://www.farnell.com/datasheets/2372721.pdf?src-supplier=Farnell, ComponentLink2Description=http://www.farnell.com/datasheets/2000266.pdf?src-supplier=Farnell, ComponentLink2URL=http://www.farnell.com/datasheets/2000266.pdf?src-supplier=Farnell, ComponentLink3Description=http://components.arrow.com/part/dataview/0323_01943898?src-supplier=Arrow+Europe, ComponentLink3URL=http://components.arrow.com/part/dataview/0323_01943898?src-supplier=Arrow+Europe, ComponentLink4Description=http://components.arrow.com/part/dataview/48680868S8397842N1004?src-supplier=Arrow+Electronics, ComponentLink4URL=http://components.arrow.com/part/dataview/48680868S8397842N1004?src-supplier=Arrow+Electronics, ComponentLink5Description=http://www.farnell.com/datasheets/2000266.pdf?src-supplier=Element14, ComponentLink5URL=http://www.farnell.com/datasheets/2000266.pdf?src-supplier=Element14, ComponentLink6Description=http://suddendocs.samtec.com/prints/lshm-1xx-xx.x-xx-dv-a-x-x-tr-mkt.pdf?src-supplier=Digi-Key, ComponentLink6URL=http://suddendocs.samtec.com/prints/lshm-1xx-xx.x-xx-dv-a-x-x-tr-mkt.pdf?src-supplier=Digi-Key, ComponentLink7Description=ftp://ftp.samtec.com/webfiles/PDF/LSHM.PDF?src-supplier=Avnet, ComponentLink7URL=ftp://ftp.samtec.com/webfiles/PDF/LSHM.PDF?src-supplier=Avnet, ComponentLink8Description=ftp://ftp.samtec.com/webfiles/PDF/LSHM.PDF?src-supplier=Avnet+Europe, ComponentLink8URL=ftp://ftp.samtec.com/webfiles/PDF/LSHM.PDF?src-supplier=Avnet+Europe, ComponentLink9Description=http://www.farnell.com/datasheets/2372721.pdf?src-supplier=Newark, ComponentLink9URL=http://www.farnell.com/datasheets/2372721.pdf?src-supplier=Newark, Contact Material=Bronze, Contact Plating=Gold, Depth=4.98mm, Housing Material=Polymer, Length=14.7mm, Manufacturer Part Number=LSHM-120-02.5-L-DV-A-N-K-TR, Number of Contacts=40, Number of Rows=2, Orientation=Straight, Packaging="Tape and Reel", Pitch=0.5mm, Pricing 1="1=6.60000, 10=5.97000, 25=5.63960, 50=5.50200, 100=5.22690, 250=4.67672 (USD)", Radiation Hardening=No, REACH SVHC="No SVHC", RoHS=Yes, RoHS Compliant=Yes, Series=LSH, Stock 1=3008, Supplier 1=Digi-Key, Termination=Solder
J2: "No Description Available", Mfr_Name=Hirose, Copyright="Copyright (C) 2022 Ultra Librarian. All rights reserved.", Manufacturer_Part_Number=DF52-16S-0.8H(21), RefDes=RefDes, Type=DEV
L1: library part CMP-2000-05912-1, "Wirewound Inductor, 10 uF, +/- 10%, 180 mA, -55 to 125 degC, 2-Pin SMD, RoHS, Tape and Reel", Current - Saturation=-, Current Rating=180mA, DC Resistance (DCR)=1.6OhmMax, Frequency - Self Resonant=25MHz, Frequency - Test=1MHz, Inductance=10µH, Manufacturer=EPCOS-(TDK), Package / Case=1210(3225Metric), Package Description="2-Pin Surface Mount Device, Body 3.2 x 2.5 mm", Q @ Freq=27@2.52MHz, Ratings=AEC-Q200, Tolerance=±10%, Category=Inductors,Coils,Chokes, Datasheet URL=https://en.tdk.eu/inf/30/db/ind_2008/b82422a_100.pdf, Datasheet Version=10/2012, Family=FixedInductors, Height - Seated (Max)="0.083\"(2.10mm)", Manufacturer URL=http://www.tdk.com/, Material - Core=Ferrite, Mounting Technology=SurfaceMount, Mounting Type=SurfaceMount, Operating Temperature=-, Package Reference=B82422A1103K100, Packaging=CutTape(CT), Series=SIMID, Shielding=Unshielded, Size / Dimension="0.126\"Lx0.098\"W(3.20mmx2.50mm)", Type=Wirewound
L2: library part CMP-14484-001484-1, "SMD Power Inductors 4.7uH ±20% 0.77A 0.13Ω", Case Code (Imperial)=1212, Case Code (Metric)=3030, Current Rating=980mA, DC Resistance (DCR)=156mR, Inductance=4.7uH, Inductance Tolerance=20%, Max DC Current=770mA, Max Operating Temperature=120°C, Min Operating Temperature=-25°C, Package Quantity=2000, Resistor Type=Wirewound, Self Resonant Frequency=48MHz, Test Frequency=100kHz, Case/Package=1212, Core Material=Ferrite, DC Current=980mA, Depth=3.1mm, Halogen Free="Halogen Free", Height=1.2mm, Height - Seated (Max)=0.047inch, Lead Free="Lead Free", Length=0.118inch, Military Standard=Not, Mount="Surface Mount", Packaging="Tape and Reel", Radiation Hardening=No, RMS Current (Irms)=980mA, RoHS Compliant=Yes, Saturation Current=770mA, Series=NR, Shielding=Shielded, Termination=SMD/SMT, Tolerance=20%, Width=0.118inch
M1: library part CMP-00274-1, "M2 Hole, 2.4mm drill, 5mm landing pads, 3mm pad in middle layers, no overlay", ClassName="Mounting Hole"
NT1 NT2: library part Net_Tie
R1 R4 R6 R8: library part CMP-26527-000038-1, "RES 1 OHM 1% 1/8W 0402", Case Code (Imperial)=0402, Case Code (Metric)=1005, Max Operating Temperature=155°C, Max Power Dissipation=125mW, Min Operating Temperature=-55°C, Package Quantity=1000, Resistance=1, Resistor Type="Thick Film", Temperature Coefficient=200ppm/°C, Tolerance=1%, Case/Package=0402, Height=0.017inch, Length=0.039inch, Mount="Surface Mount", Number of Terminations=2, Packaging="Tape and Reel", RoHS Compliant=Yes, Series=CSR, Width=0.02inch
R2 R3: library part CMP-2002-00431-1, Manufacturer=Panasonic, Resistance=100, Part Number=ERJ-2GEJ101X
R5: library part CMP-2002-07066-1, Manufacturer="Yageo / Phycomp", Resistance=2M, Part Number=RC0402FR-072ML
R7: library part CMP-2002-00733-1, Manufacturer=Panasonic, Resistance=178k, Part Number=ERJ-2RKF1783X
R9 R10 R11 R12 R14 R15 R16 R17 R18 R20 R21: library part CMP-1011-00001-2, Manufacturer="Yageo / Phycomp", Resistance=0, Part Number=RC0402JR-070RL
R13 R19: library part CMP-2100-03669-1, "Chip Resistor, 100 Ohm, +/-1%, 0.125 W, -55 to 155 degC, 0805 (2012 Metric), RoHS, Tape and Reel", Case Code (Imperial)=0805, Case Code (Metric)=2012, Manufacturer=Yageo, Max Operating Temperature=155degC, Max Power Dissipation=125mW, Min Operating Temperature=-55degC, Package Description="2-Pin Surface Mounted Device, Body 2 x 1.25 mm", Package Quantity=1, Resistance=100, Temperature Coefficient=100ppm/degreesC, Tolerance=1%, Voltage Rating=150V, Case/Package=0805, Composition=ThickFilm, Datasheet URL=http://www.yageo.com/NewPortal/yageodocoutput?fileName=/pdf/R-Chip/PYu-RC_Group_51_RoHS_L_5.pdf, Datasheet Version="Rev. 5, 10/2016", Depth=1.25mm, Height=0.024inch, Lead Free=LeadFree, Lead Pitch=0.4mm, Length=2mm, Manufacturer URL=http://www.yageo.com/, Military Standard=Not, Number of Pins=2, Number of Terminations=2, Package Reference=0805, Packaging=TapeandReel, Power Rating=125mW, REACH SVHC=Unknown, RoHSCompliant=true, Termination=SMD/SMT, Voltage Rating (DC)=150V, Width=0.049inch
TP1 TP2 TP3 TP4 TP5 TP6 TP7 TP8 TP9 TP10 TP11 TP12 TP13 TP14: library part CMP-0484-00002-1, "Test Point, Surface Mount, Circular, Pad Diameter 1 mm"
U1: library part CMP-0478-00154-1, "Dual Micropower DC/DC Converter with Positive and Negative Outputs, 1.2 to 15 V Vin, 10-pin SOP (MS-10), -40 to 125 degC, Pb-Free", Manufacturer="Linear Technology", ComponentLink1Description="Manufacturer URL", ComponentLink1URL=http://www.linear.com/, ComponentLink2Description=Datasheet, ComponentLink2URL=http://cds.linear.com/docs/en/datasheet/1945fa.pdf, ComponentLink3Description="Package Specification", ComponentLink3URL=http://cds.linear.com/docs/en/packaging/05081661_F_MS.pdf, DatasheetVersion="Rev. A", Mounting Technology="Surface Mount", Number of Outputs=2, PackageDescription="10-Pin Plastic MSOP, Body 3 x 3 mm, Pitch 0.5 mm", PackageReference=MS-10, PackageVersion="Rev. E, 06/2010", PartNumber=LT1945IMS#PBF, RoHS=TRUE, Vin Max(V)=15, Vin Min(V)=1.2
U2: library part CMP-0347-00055-2, "Boost Voltage Converter with 0.7 to 5.5 V Input and 5 V Output, -40 to 85 degC, 6-Pin SC70 (DCK), Green (RoHS & no Sb/Br)", Manufacturer="Texas Instruments", Switching Frequency(Max)(kHz)=2000, Code_JEDEC=MO-203-AB, ComponentLink1Description=Datasheet, ComponentLink1URL=http://www.ti.com/general/docs/lit/getliterature.tsp?genericPartNumber=TPS61222&fileType=pdf, ComponentLink2Description="Package Specification", ComponentLink2URL=http://www.ti.com/litv/pdf/mpds114c, DatasheetVersion=SLVS776, Eco-Plan="Green (RoHS & no Sb/Br)", Mounting Technology="Surface Mount", PackageDescription="6-Pin Plastic Small-Outline Package, 2 x 1.3 mm Body, 0.65 mm Pitch, 2.1 mm Lead Span", PackageReference=DCK0006A, PackageVersion="revG, Jan-2007", PartNumber=TPS61222DCKR, Regulated Outputs(#)=1, SubFamily="Step-Up Regulator", Topology=Boost, Vin(Max)(V)=5.5, Vin(Min)(V)=0.7, Vout(Max)(V)=5, Vout(Min)(V)=5
U3 U5 U6: "No Description Available", Mfr_Name=Microchip, RefDes=RefDes, Type=DEV
  U3 U6: Copyright="Copyright (C) 2021 Ultra Librarian. All rights reserved.", Manufacturer_Part_Number=MCP1402T-E/OT
  U5: Copyright="Copyright (C) 2022 Ultra Librarian. All rights reserved.", Manufacturer_Part_Number=MD0101K6-G
U4: "16-CH 200V No Hv Bias Switch (SPST), 1 Bleed Resistor 48 LQFP 7X7X1.4MM T/r Rohs Compliant: Yes", Manufacturer=Microchip, Supplier Part Number 1=150-HV2708T-C/R8XCT-ND, Category="Decoders and Multiplexers", Manufacturer Part Number=HV2708T-C/R8X, Pricing 1="1=19.01000, 25=15.84720, 100=14.65500 (USD)", RoHS=Yes, Stock 1=440, Supplier 1=Digi-Key

## Via types
v1: diameter 0.62, hole 0.3, Top Layer to Bottom Layer, tented both sides, 79 vias

## Nets (pads, with @x,y where several pads share a name; then routed paths per layer and width w, separated by ;. In a path a pad name is that pad's centre, name@x,y a point inside that pad or via, vN(x,y) a via of type N, cw(c..) or ccw(c..) an arc to the next point about the centre after c; other vN are vias at no path point)
CH0_OUT: J1.38 R20.1 R21.1 | length 33.9
  Signal Layer 2 w0.2: v1(7.49,14.545) 7.41,14.625 7.41,14.99 7.4,15 7.4,17.2 11.475,21.275 13.325,21.275 13.941,21.891 v1(14.011,21.891) 14.092,21.811 14.092,21.433 14.4,21.125 14.4,17.999 14.375,17.974 14.375,9.557 12.874,8.056 v1(12.874,7.968)
  Bottom Layer w0.2: v1(7.49,14.545) 7.41,14.625 7.41,14.99 7.291,15.109 7.291,17.428 7.913,18.05 R20.1 ; R21.1 12.15,8.7 12.874,7.976 v1(12.874,7.968) ; J1.38 14.006,23.194 14.006,21.897 v1(14.011,21.891)
DIG_GND: C14.1 C15.2 C18.1 C19.2 NT2.2 U4.17 | length 5.1
  Top Layer w0.3: v1@2.75,13.75 2.762,13.762 U4.17
  Top Layer w0.4: v1(2.61,13.715) 2.715,13.715 v1@2.75,13.75
  Top Layer w0.5: v1(0.723,10.25) 0.746,10.273 0.746,10.5 0.771,10.525 C18.1 0.9,10.55 2.075,10.55 C19.2 ; NT2.2@0.875,16.95 C14.1 0.913,16.288 2.187,16.288 C15.2
HV_EN: J1.15 U1.4 | length 38.6
  Signal Layer 2 w0.2: v1(5.55,4.5) 6.16,3.89 6.16,2.621 6.556,2.225 9.55,2.225 13.117,5.792 13.117,6.715 15.101,8.699 15.101,18.795 15.502,19.196 15.87,19.196 v1(15.951,19.276)
  Bottom Layer w0.2: v1(5.55,4.5) 5.636,4.5 5.861,4.725 U1.4 ; J1.15 8.5,20.338 8.662,20.5 12.7,20.5 13.025,20.825 14.696,20.825 15.346,21.475 16.154,21.475 16.725,20.904 16.725,20.096 15.951,19.322 v1(15.951,19.276)
HV_GND: C1.2 C3.2 C4.2 C6.2 NT1.2 R2.2 R3.2 R7.1 U1.2 U1.3 U1.7 U1.9 | length 14.2
  Bottom Layer w0.25: U1.7 3.65,4.725 v1(3.7,4.675) ; U1.9 3.475,5.725 3.6,5.6 v1(3.7,5.6) ; R2.2 3.263,7.363 3.938,7.363 NT1.2 ; v1(5.242,7.465) 5.312,7.395 5.955,7.395 R3.2 ; 5.746,5.729 5.75,5.725 U1.2@6.2,5.725 ; v1@5.821,5.275 U1.3@6.7,5.275 ; U1.3 U1.3@6.7,5.275 ; 7.65,5.725 U1.2 U1.2@6.2,5.725 ; U1.2@6.2,5.725 5.821,5.346 5.621,5.346 v1(5.55,5.275) U1.3@6.7,5.275
  Bottom Layer w0.5: v1(0.925,7.1) 0.937,7.088 0.937,6.787 C1.2 ; 7.65,5.725 8.1,6.175 8.825,6.175 R7.1 8.925,6.275 8.925,6.925 9.373,7.373 10.022,7.373 C3.2 10.25,7.551 11.4,7.551 C4.2 ; C6.2 v1(10.825,1.7)
  other v1: 2.7,1
NetC2_1: C2.1 C3.1 C4.1 C6.1 D1.1 FB1.1 R5.2 | length 11.4
  Bottom Layer w0.5: C2.1 C2.1@8.025,3.275 ; D1.1 8.367,1.475 8.325,1.517 8.325,2.175 8.025,2.475 C2.1@8.025,3.275 ; R5.2 C2.1@8.025,3.275
  Bottom Layer w0.8: R5.2 10.45,3.275 10.475,3.3 10.475,3.926 C6.1 10.624,4.276 10.196,4.704 10.196,6.345 C3.1 10.25,6.349 11.4,6.349 C4.1 11.5,6.4 13.199,6.4 FB1.1
NetC2_2: C2.2 R5.1 R7.2 U1.5 | length 3.3
  Bottom Layer w0.25: U1.5 7.55,4.225
  Bottom Layer w0.5: 7.55,4.225 7.59,4.185 8.015,4.185 C2.2 8.075,4.125 R5.1 8.875,4.15 8.875,5.175 R7.2
NetC9_1: C9.1 R10.1 R18.2 | length 2.2
  Bottom Layer w0.5: C9.1@4,10.575 4.15,10.725 4.15,11.25 4.175,11.275 4.175,11.775 4.2,11.8 R18.2 4.237,11.788 5.112,11.788 R10.1
NetC10_1: C10.1 R11.1 R12.2 | length 2.7
  Bottom Layer w0.5: R12.2 R11.1 4.65,17.9 4.65,16.225 C10.1
NetC11_1: C11.1 R12.1 R13.1 | length 3.3
  Bottom Layer w0.5: R12.1 2.8,17.925 2.775,17.9 2.775,17.25 2.3,16.775 R13.1 2.293,16.657 3.35,16.657 3.35,16.325 3.5,16.175 C11.1
NetC16_1: C16.1 R14.1 R15.2 | length 2.4
  Top Layer w0.2: R15.2 1.837,21.838 R14.1@2.788,21.838 ; C16.1 2.4,21.45 R14.1@2.788,21.838 ; R14.1 R14.1@2.788,21.838
NetC20_1: C20.1 R18.1 R19.1 | length 3.1
  Bottom Layer w0.5: R19.1@1.4,11.275 1.607,11.482 2.85,11.482 3.143,11.775 3.35,11.775 R18.1 ; C20.1 3.1,11.482
NetD1_2: D1.2 L1.2 U1.6 | length 5.8
  Bottom Layer w0.2: 2.45,4 2.45,4.202 U1.6@2.473,4.225
  Bottom Layer w0.25: U1.6@2.473,4.225 U1.6
  Bottom Layer w0.5: L1.2 4.475,1.8 4.8,1.475 D1.2
  Bottom Layer w0.6: 2.45,4 2.45,3.9 2.575,3.775
  Bottom Layer w0.8: 2.575,3.775 2.9,3.45 3.025,3.45 3.525,2.95 4.3,2.95 4.475,2.775 L1.2
NetL2_2: L2.2 U2.5 | length 2.7
  Bottom Layer w0.4: U2.5 14.325,11.525 14.425,11.425
  Bottom Layer w0.8: 14.425,11.425 14.8,11.05 15.25,11.05 L2.2
NetR2_1: R2.1 U1.10 | length 1.3
  Bottom Layer w0.25: R2.1 2.35,6.225 U1.10
NetR3_1: R3.1 U1.1 | length 1.3
  Bottom Layer w0.25: U1.1 6.925,6.225 R3.1
NetR9_1: R9.1 R11.2 U3.5 | length 10.5
  Signal Layer 1 w0.5: v1(5.772,16.025) 5.772,15.858 6.268,15.361 7.907,15.361 8.2,15.069 8.2,13.651 7.766,13.217 7.766,12.029 8.162,11.632 v1(8.162,11.6)
  Bottom Layer w0.28: v1(5.772,16.025) 5.772,16.804 5.765,16.811 5.788,16.834 U3.5@5.829,16.834 ; U3.5@5.92,16.925 U3.5 ; R9.1 7.8,12.075 8.097,11.778 8.097,11.665 v1(8.162,11.6)
  Bottom Layer w0.5: R11.2 5.5,17.925 5.525,17.9 5.525,17.875 5.55,17.85 5.55,16.929 5.554,16.925 5.833,16.925 5.829,16.921 5.829,16.834 5.772,16.777 v1(5.772,16.025)
NetR9_2: R9.2 R10.2 U6.5 | length 2.6
  Bottom Layer w0.5: R10.2 6.6,11.775 6.9,12.075 R9.2 6.925,10.829 6.821,10.725 U6.5
NetR14_2: R14.2 U5.2 | length 2.1
  Top Layer w0.2: R14.2 4.05,21.825 4.225,22 4.225,22.575 4.422,22.772 U5.2@5.001,22.772
NetR16_1: R16.1 U5.16 | length 2
  Top Layer w0.2: U5.16 10.226,22.291 10.356,22.422 10.475,22.422 10.906,22.853 11.385,22.853 11.387,22.85 11.65,22.85 R16.1
NetR17_1: R17.1 U4.24 | length 1.7
  Top Layer w0.2: R17.1 2.85,10 3.016,10.166 3.744,10.166 U4.24
NetR20_2: R20.2 U3.3 | length 5.6
  Bottom Layer w0.2: U3.3 8.145,15.025 7.991,15.179 7.991,15.354 7.873,15.471 7.787,15.471 7.641,15.617 7.641,17.283 7.883,17.525 9.529,17.525 9.675,17.671 9.675,17.775 9.95,18.05 R20.2
NetR21_2: R21.2 U6.3 | length 1.5
  Bottom Layer w0.2: U6.3 9.308,8.762 10.663,8.762 R21.2
SIGNAL_RX: J1.40 TP13.1 U5.17 | length 16.1
  Top Layer w0.2: TP13.1 4.209,23.4 4.556,23.747 10.58,23.747 10.927,23.4 ; U5.17 10.326,22.799 10.927,23.4 ; v1(14.726,22.445) 14.719,22.451 13.877,22.451 12.929,23.4 10.927,23.4
  Bottom Layer w0.2: J1.40 14.5,22.6 14.655,22.445 v1(14.726,22.445)
SW_EN: J1.13 U2.6 | length 26.4
  Signal Layer 2 w0.2: v1(13.642,8.032) 14.751,9.141 v1(14.751,21.675)
  Bottom Layer w0.2: J1.13 8,20.333 8.517,20.85 11.876,20.85 12.201,21.175 14.225,21.175 14.725,21.675 v1(14.751,21.675) ; v1(13.642,8.032) 13.7,8.09 13.7,11.554 13.675,11.579 U2.6
SW_TR1: J2.15 U4.10 U4.11 | length 11.4
  Top Layer w0.3: U4.11 5.724,17.227 5.724,18.124 5.9,18.3 6.519,18.3 ; U4.10 6.232,17.227 6.232,18.014 6.519,18.3 ; J2.15 14.133,19.833 13.69,19.833 13.512,19.655 11.317,19.655 10.414,18.752 7.728,18.752 7.275,18.3 6.519,18.3
SW_TR2: J2.13 U4.6 U4.7 | length 9.1
  Top Layer w0.28: U4.7 7.746,18.073 7.91,18.237 8.502,18.237 ; U4.6 8.254,17.99 8.502,18.237 ; J2.13 14.123,18.477 13.573,18.477 13.15,18.9 11.225,18.9 10.562,18.237 8.502,18.237
SW_TR3: J2.11 U4.3 U4.48 | length 6.2
  Top Layer w0.28: U4.3 9.778,16.397 10.05,16.125 10.975,16.125 11.306,15.794 U4.48 ; U4.48 13.069,15.794 13.25,15.975 13.25,16.5 13.475,16.725 14.225,16.725 J2.11
SW_TR4: J2.9 U4.44 U4.45 | length 4.3
  Top Layer w0.28: U4.44 13.111,13.762 13.275,13.926 13.275,14.525 ; U4.45 13.02,14.27 13.275,14.525 ; J2.9 14.225,15.125 13.525,15.125 13.275,14.875 13.275,14.525
SW_TR5: J2.7 U4.40 U4.41 | length 4.5
  Top Layer w0.28: U4.40 12.98,11.73 13.157,11.907 13.157,12.406 ; U4.41 12.99,12.238 13.157,12.406 ; J2.7 14.225,13.575 13.6,13.575 13.325,13.3 13.325,12.574 13.157,12.406
SW_TR6: J2.5 U4.34 U4.37 | length 6.9
  Top Layer w0.28: U4.34 9.778,9.557 10.172,9.95 11.076,9.95 11.411,10.284 11.989,10.284 12.068,10.206 U4.37 13.048,10.206 13.425,10.583 13.425,11.567 13.733,11.875 14.175,11.875 J2.5
SW_TR7: J2.3 U4.30 U4.31 | length 9.8
  Top Layer w0.28: U4.30 7.746,7.904 7.975,7.675 8.525,7.675 ; U4.31 8.254,8.186 8.25,8.182 8.25,7.95 8.525,7.675 ; J2.3 14.123,10.223 13.673,10.223 11.125,7.675 8.525,7.675
SW_TR8: J2.1 U4.26 U4.27 | length 11.6
  Top Layer w0.28: U4.26 5.714,7.836 5.9,7.65 6.475,7.65 ; U4.27 6.222,7.903 6.475,7.65 ; J2.1 12.808,8.75 11.303,7.245 7.78,7.245 7.375,7.65 6.475,7.65
SW_TR_1_2_7_8_DRV: R19.2 TP14.1 U4.5 U4.9 U4.25 U4.29 | length 37.3
  Top Layer w0.2: v1(1.136,8.011) 1.775,7.372 1.775,6.175 1.435,5.835 1.435,4.36 TP14.1
  Top Layer w0.28: U4.25 5.206,9.581 5.275,9.65 5.3,9.65 6.14,10.49 6.14,12.007 5.706,12.441 5.706,13.772 6.2,14.266 v1@6.2,14.3 ; v1(6.2,14.31) v1@6.2,14.3 ; v1(6.562,16.071) 6.562,16.163 6.73,16.331 U4.9 ; U4.29 7.238,9.638 7.1,9.776 7.1,13.564 6.518,14.146 6.446,14.146 6.292,14.3 v1@6.2,14.3 ; U4.5 8.762,15.805 8.91,15.657 v1(8.91,14.31)
  Signal Layer 1 w0.5: v1(1.136,8.011) 4.877,11.752 6.372,11.752 7.016,12.396 7.016,13.494 v1(6.2,14.31)
  Bottom Layer w0.28: v1(6.562,16.071) 6.562,15.979 6.7,15.842 6.7,15.8 6.899,15.601 6.899,14.651 6.614,14.365 6.255,14.365 v1(6.2,14.31) 6.265,14.245 6.917,14.245 7.217,13.945 7.805,13.945 8.17,14.31 v1(8.91,14.31)
  Bottom Layer w0.5: v1(1.136,8.011) 1.136,8.043 1.2,8.107 1.2,9.075 R19.2@1.4,9.275
SW_TR_3_4_5_6_DRV: R13.2 TP9.1 U4.33 U4.39 U4.43 U4.47 | length 30.5
  Top Layer w0.2: TP9.1 1.45,13.3 0.8,13.3 v1(0.75,13.35) 0.825,13.425 1.5,13.425 TP9.1@1.575,13.5
  Top Layer w0.28: U4.33 v1@9.27,12.07 ; v1(9.567,12.033) 9.535,12.065 9.275,12.065 v1@9.27,12.07 ; v1(10.2,14.576) 10.299,14.576 11.125,13.75 11.125,13.573 11.444,13.254 U4.43 ; v1@10.4,14.624 10.4,14.95 10.736,15.286 U4.47 ; U4.39@11.636,11.212 11.454,11.212 11.195,11.47 11.195,12.254 10.566,12.884 10.084,12.884 v1@9.27,12.07
  Bottom Layer w0.2: v1(0.75,13.35) 0.83,13.43 1.318,13.43 1.5,13.613 ; R13.2@1.55,14.275 R13.2@2.05,14.775
  Bottom Layer w0.28: v1(9.567,12.033) v1@9.6,12.065 ; 9.6,13.712 v1@9.6,12.065 ; 9.6,13.888 9.6,13.6 v1@9.6,12.065
  Bottom Layer w0.35: 4.782,13.2 5.371,13.2 5.375,13.197
  Bottom Layer w0.4: 4.65,13.2 4.782,13.2
  Bottom Layer w0.5: R13.2@1.55,14.275 1.5,14.225 1.5,13.613 1.5,13.43 1.5,13 2,12.5 3.95,12.5 4.65,13.2 ; R13.2@2.05,14.775 R13.2 ; 5.371,13.2 5.6,13.2 5.8,13.4 9.288,13.4 9.6,13.712 10.177,14.289 10.177,14.553 v1(10.2,14.576)
SW_TRX_RX: C17.1 R15.1 U4.4 U4.8 U4.12 U4.28 U4.32 U4.38 U4.42 U4.46 | length 43.8
  Top Layer w0.22: R15.1 0.95,21.825 0.95,20.875 C17.1 1.25,20.625 1.54,20.335 1.54,20.06 1.834,19.766 2.951,19.766 3.11,19.608 3.11,17.415 3.7,16.825 3.8,16.725 4.743,16.725 ; U4.12@5.206,16.78 U4.12 U4.12@5.206,17.808
  Top Layer w0.28: 4.743,16.725 5.179,16.288 ; U4.12@5.206,16.78 5.206,16.315 5.165,16.274 5.165,15.729 5.212,15.729 5.242,15.7 5.249,15.7 5.523,15.425 6.925,15.425 7.591,16.091 ; v1(6.306,12.69) 6.306,12.603 6.67,12.239 6.67,9.598 6.73,9.538 U4.28 ; U4.8 7.238,16.444 7.591,16.091 ; v1@8.385,12.509 8.762,12.132 U4.32 ; U4.4 9.27,15.944 9.6,15.614 9.6,14.253 10.053,13.8 ; v1(10.35,12.251) 10.725,11.876 10.725,11.25 11.22,10.755 12.175,10.755 U4.38 ; v1@10.403,13.654 11.311,12.746 U4.42 ; v1(10.459,13.567) 10.394,13.632 10.161,13.632 10.097,13.697 9,12.6 v1(8.476,12.6) 8.1,12.976 8.1,15.582 7.591,16.091 ; v1(11.076,14.651) 11.099,14.651 11.226,14.778 U4.46
  Bottom Layer w0.28: v1(6.306,12.69) 6.316,12.7 6.609,12.7 6.709,12.8 8.033,12.8 v1@8.233,12.6 ; v1(8.476,12.6) v1@8.513,12.637 ; v1@10.338,13.687 10.717,14.066 10.717,14.2 11.076,14.559 v1(11.076,14.651) ; v1(10.35,12.251) 10.404,12.305 10.404,13.512 v1(10.459,13.567)
Switch_CLK: J1.03 TP10.1 U4.20 | length 11.8
  Top Layer w0.2: U4.20 4.784,12.238 5.012,12.466 5.021,12.466 v1(5.099,12.544) ; TP10.1 4.153,17.878 4.153,18.484 4.25,18.581 v1(4.25,18.695)
  Signal Layer 2 w0.2: v1(4.25,18.695) 4.25,18.593 3.65,17.993 3.65,14.015 5.099,12.566 v1(5.099,12.544)
  Bottom Layer w0.2: v1(4.25,18.695) 4.35,18.596 4.651,18.596 4.796,18.45 5.383,18.45 5.5,18.567 J1.03
Switch_CLR: J1.01 U4.22 | length 13.2
  Top Layer w0.28: U4.22 4.557,11.222 4.935,10.843 4.935,10.541 v1(5.125,10.351)
  Signal Layer 2 w0.2: v1(3.68,19.315) 3.68,19.312 3.25,18.882 3.25,12.226 v1(5.125,10.351)
  Bottom Layer w0.22: v1(3.68,19.315) 4.302,19.315 4.487,19.5 J1.01
Switch_D_IN: J1.05 TP11.1 U4.19 | length 22.1
  Top Layer w0.2: U4.19 3.823,12.786 4.54,12.786 ; 4.54,12.786 4.54,12.797 4.608,12.864 4.618,12.864 4.765,13.011 4.765,13.519 5.064,13.818 v1(5.064,13.84) ; v1(10.836,21.99) 10.836,21.877 11.075,21.637 TP11.1
  Signal Layer 2 w0.2: v1(5.064,13.84) 4.765,13.84 4,14.605 4,16.333 6.944,19.277 9.657,21.99 v1(10.836,21.99)
  Bottom Layer w0.2: J1.05 6,20.541 7.435,21.976 10.821,21.976 v1(10.836,21.99)
Switch_LE: J1.09 TP12.1 U4.21 | length 25.5
  Top Layer w0.2: v1(11.617,21.835) 12.074,21.378 12.647,21.378 TP12.1
  Top Layer w0.28: U4.21 4.85,11.73 v1(5.54,11.04)
  Signal Layer 2 w0.2: v1(5.54,11.04) 5.666,11.166 5.666,14.042 5.64,14.068 5.191,14.517 4.791,14.517 4.44,14.868 4.44,16.278 9.562,21.4 11.105,21.4 11.54,21.835 v1(11.617,21.835)
  Bottom Layer w0.2: J1.09 7,20.917 7.643,21.56 8.107,21.56 8.237,21.43 11.179,21.43 11.583,21.835 v1(11.617,21.835)
USS_GND: C5.2 C7.2 C8.2 C9.2 C10.2 C11.2 C12.1 C13.2 C16.2 C17.2 C20.2 C21.1 C22.2 J1.27 J1.33 J1.34 J1.35 J1.36 J2.2 J2.4 J2.6 J2.8 J2.10 J2.12 J2.14 J2.16 M1.1 NT1.1 NT2.1 R16.2 R17.2 U2.3 U3.1 U3.4 U4.13 U5.19 U6.1 U6.4 | length 46.4
  Top Layer w0.2: NT2.1 0.875,18.1 1.2,18.425 C17.2 1.225,19.1 C16.2 ; R16.2 12.55,22.875 13.254,22.171 v1(13.254,22.08)
  Top Layer w0.3: v1(6.008,21.342) 6.075,21.275 U5.19 ; v1(6.657,21.99) 6.76,21.99 U5.19 ; v1(7.875,21) 7.779,21 7.765,20.985 U5.19 ; M1.1@14.4,2.975 M1.1@14.612,2.975 ; v1(16.575,0.925) v1@16.575,1.012
  Top Layer w0.5: v1(13.259,20.265) 13.282,20.288 13.282,20.335 13.68,20.733 14.233,20.733 J2.16 ; J2.2 15.576,9.55 v1(16.126,9) ; J2.4 16,11.15 v1(16.11,11.04) ; J2.6 14.267,12.767 14.82,12.767 15.171,13.118 15.171,14.032 14.87,14.333 ; J2.8 14.267,14.367 15.059,14.367 15.271,14.579 v1(15.661,14.579) ; J2.10 v1(15.661,15.95) ; J2.12 14.262,17.537 15.647,17.537 v1(15.661,17.525) ; J2.14 14.267,19.133 15.057,19.133 15.628,18.563 v1(15.661,18.563)
  Bottom Layer w0.3: J1.27 11.5,18.464 11.8,18.164 11.8,17.475 11.75,17.425 C12.1 ; J1.33 13,20.1 13.104,20.204 13.198,20.204 v1(13.259,20.265) 13.5,20.024 J1.35 ; J1.34 13,22.331 13.251,22.08 v1(13.254,22.08) ; v1@13.25,22.062 13.25,22.127 13.5,22.377 J1.36
  Bottom Layer w0.5: C20.2 3.112,9.088 3.937,9.088 C9.2@3.95,9.075 ; C11.2 4.5,14.675 4.7,14.675 5,14.975 v1(5,15.1) ; NT1.1 C9.2@3.95,9.075 ; C10.2@4.974,15.087 v1@4.974,15.12 ; v1@4.975,15.125 5.007,15.125 5.103,15.029 5.951,15.029 U3.4 ; U6.4 5.239,8.825 4.639,8.225 v1(4.606,8.225) 4.583,8.248 4.583,8.492 4,9.075 C9.2@3.95,9.075 ; U3.1 10.325,16.925 C13.2 10.5,17.1 11.3,17.1 C12.1@11.423,17.223 ; U6.1 9.249,10.721 10.361,10.721 10.326,10.757 v1(10.326,10.801) 10.36,10.801 10.468,10.693 10.468,11.093 C22.2 C21.1 ; v1(11.461,16.64) 11.426,16.676 11.426,17.22 C12.1@11.423,17.223 ; C12.1 11.6,17.4 C12.1@11.423,17.223 ; C8.2 C8.2@14.273,17.502 ; U2.3 14.975,14.25 15.304,14.579 C7.2 ; C5.2 16.087,7.887 16.087,8.962 v1(16.126,9)
  Bottom Layer w0.8: C8.2@14.256,17.502 14.256,17.525 v1(15.661,17.525)
  other v1: 12.675,0.9 16.65,5.5 16.2,6.4 16.2,10 16.65,16.3 16.65,18.1
VCC_AFE_CONN: J1.29 J1.30 J1.31 J1.32 R1.1 R6.1 TP1.1 TP5.1 | length 36
  Top Layer w0.2: R1.1 6.825,3.525 TP1.1
  Top Layer w0.3: TP5.1@14.3,23.6 14.489,23.6 14.973,23.116 15.143,23.116 v1(15.204,23.055)
  Top Layer w0.5: R1.1 6.7,3.032 6.825,2.907 v1(6.825,2.875)
  Top Layer w0.6: R6.1 12.05,17.882 12.41,18.242 v1(12.41,18.248)
  Signal Layer 1 w0.5: v1(12.324,22.14) 12.332,22.132 12.332,18.358 12.41,18.28 v1(12.41,18.248)
  Signal Layer 2 w0.3: v1(12.324,22.14) 13.239,23.055 v1(15.204,23.055)
  Signal Layer 2 w0.7: 10.447,16.503 10.447,16.772 11.923,18.248 v1(12.41,18.248)
  Signal Layer 2 w0.8: v1(6.825,2.875) 10.625,6.675 10.625,9.868 11.936,11.179 11.936,15.007 11.127,15.816 11.069,15.816 10.447,16.439 10.447,16.503
  Bottom Layer w0.3: J1.29 12,18.6 12.352,18.248 v1(12.41,18.248) ; J1.30 12,22.398 v1@12.324,22.074 ; v1@12.294,18.306 12.5,18.512 J1.31 ; v1@12.429,21.969 v1@12.324,22.074 ; J1.32 12.5,22.291 12.349,22.14 v1(12.324,22.14) v1@12.324,22.074
VCC_HV: C12.2 C13.1 C21.2 C22.1 R4.2 TP4.1 U3.2 U6.2 | length 22.2
  Top Layer w0.2: TP4.1 12.35,6.4 R4.2
  Top Layer w0.5: v1(11.951,5.418) 11.974,5.441 11.974,5.874 12.4,6.3 R4.2
  Signal Layer 2 w0.5: v1(11.951,5.418) 11.951,5.949
  Signal Layer 2 w0.8: 11.951,5.949 11.701,6.199 v1(11.701,9.6) 12.886,10.785 12.886,15.799 v1(12.29,16.394)
  Bottom Layer w0.28: v1@11.615,9.44 11.615,9.64 11.655,9.6 v1(11.701,9.6) 11.701,9.676 11.75,9.725 C21.2
  Bottom Layer w0.5: U3.2@8.549,15.979 U3.2 8.549,15.971 9.504,15.971 9.875,15.6 10.2,15.6 C13.1 10.5,15.6 10.875,15.6 11.15,15.875 11.725,15.875 C12.2 11.9,15.9 12.267,16.267 12.267,16.371 v1(12.29,16.394) ; U6.2 9.249,9.771 10.554,9.771 C22.1 10.725,9.6 v1(11.701,9.6) ; C21.2@11.725,9.55 11.725,9.7 C21.2@11.75,9.725
VCC_HV_REG_IN: C1.1 L1.1 R1.2 TP2.1 U1.8 | length 14.2
  Top Layer w0.2: TP2.1 5.454,3.525 R1.2@5.539,3.439
  Top Layer w0.5: v1(5.51,2.729) 5.51,2.761 5.7,2.951 R1.2
  Signal Layer 2 w0.8: v1(0.875,5.65) 0.875,4.05 2.196,2.729 v1(5.51,2.729)
  Bottom Layer w0.25: 1.75,5.225 U1.8
  Bottom Layer w0.4: 1.575,5.25 1.6,5.225 1.75,5.225
  Bottom Layer w0.5: C1.1 0.975,5.25 1.575,5.25
  Bottom Layer w0.6: v1(0.875,5.65) 0.879,5.646 0.879,5.346 C1.1